# EAGLE board Car Engine Room (EAGLE 6.2)
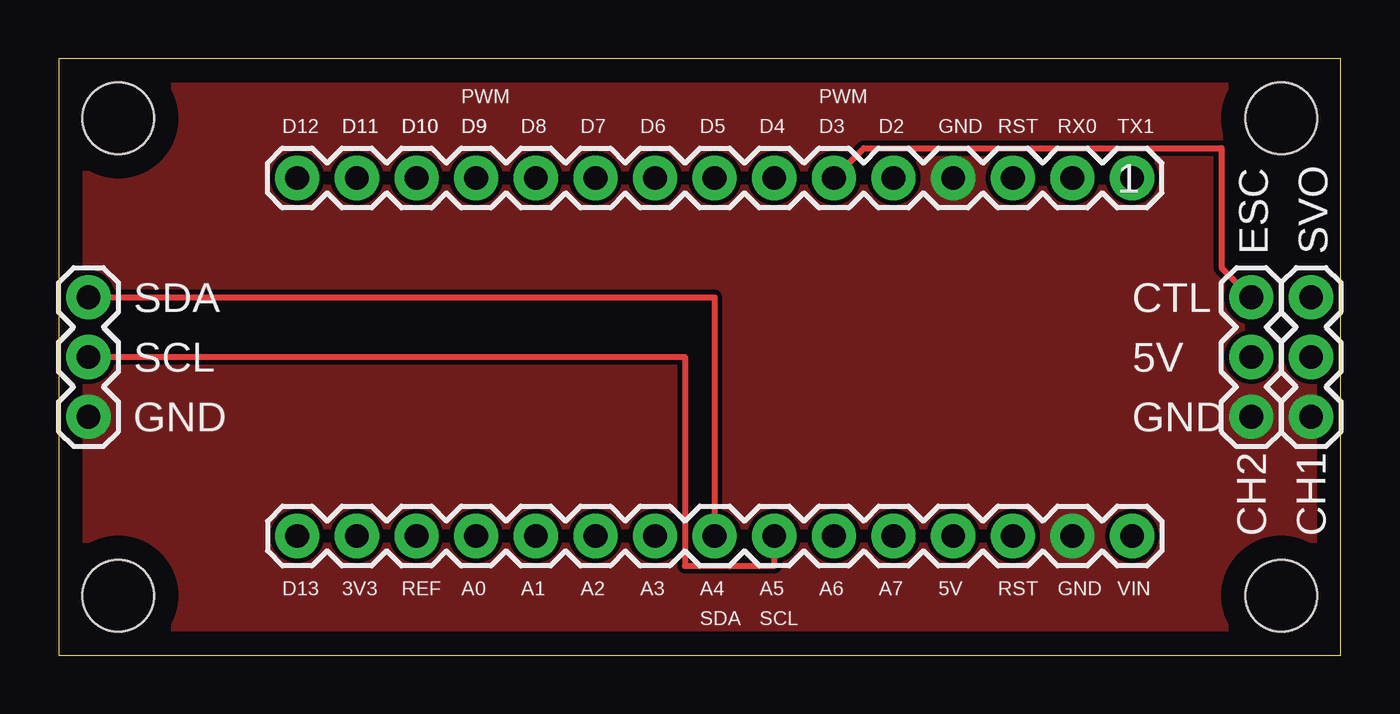
[diagram p0: board, top side]
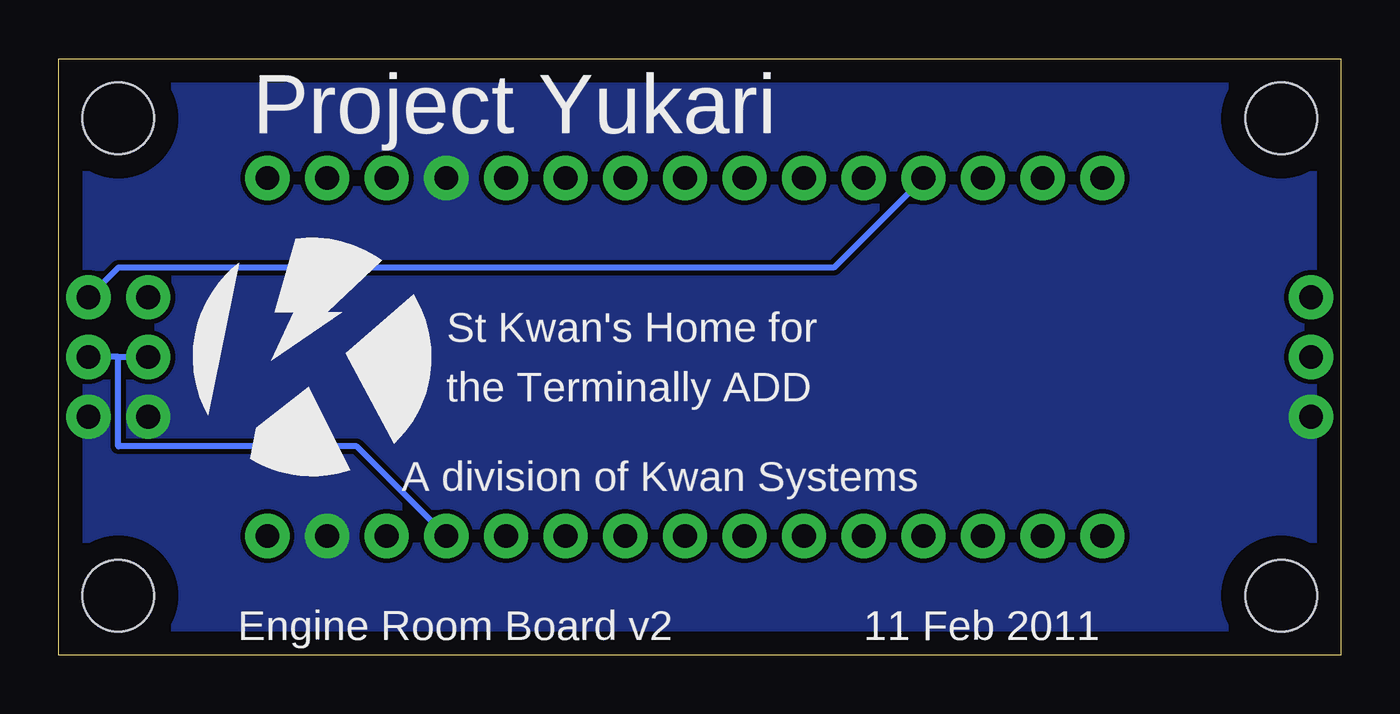
[diagram p1: board, bottom side, seen from below]

Size 54.61 x 25.4 mm. Coordinates in mm from the lower left corner, seen from the top.
Outline: 0,0 54.61,0 54.61,25.4 0,25.4 0,0
Copper layers (1*16): Top 0.035mm / dielectric 1.5mm / Bottom 0.035mm
Design rules: minimum track width 10mil, minimum drill 24mil, track to track 8mil, track to pad 8mil, pad to pad 8mil, via to via 8mil, smd to smd 8mil, copper to edge 40mil, drill to drill 8mil, minimum pad ring 10mil, minimum via ring 8mil, stop-mask expansion 4mil, vias tented up to drill 0mil, thermal gap 10mil
Net classes: 1 power: width 1.524 mm, clearance 0.254 mm

## Footprints (pad centres in the part's own frame; a part is rotated, then mirrored left to right if it is on the bottom)
1X03 = drill 1.016 pad 1.88: 1 0,0; 2 2.54,0; 3 5.08,0
1X15 = drill 1.016 pad 1.88: 1 0,0; 2 2.54,0; 3 5.08,0; 4 7.62,0; 5 10.16,0; 6 12.7,0; 7 15.24,0; 8 17.78,0; 9 20.32,0; 10 22.86,0; 11 25.4,0; 12 27.94,0; 13 30.48,0; 14 33.02,0; 15 35.56,0
STAND-OFF-TIGHT = hole 3.048: 0,0

## Placement (x,y rotation side)
BRIDGE  [1X03]  1.27,10.16 90 top
ESC  [1X03]  50.8,10.16 90 top
JP1  M15  [1X15]  10.16,5.08 0 top
JP5  M15  [1X15]  45.72,20.32 180 top
SVO  [1X03]  53.34,10.16 90 top
U$1  [STAND-OFF-TIGHT]  2.54,2.54 0 top
U$2  [STAND-OFF-TIGHT]  2.54,22.86 0 top
U$3  [KWAN_CIRCLE]  43.81,12.7 0 bottom
U$4  [STAND-OFF-TIGHT]  52.07,22.86 0 top
U$5  [STAND-OFF-TIGHT]  52.07,2.54 0 top

## Library data of the parts
BRIDGE ESC JP1 JP5 SVO U$1-U$5 = SparkFun

## Nets
GND: BRIDGE.1 ESC.1 JP1.14 JP5.4 SVO.1
IN1: ESC.3 JP5.6
IN2: JP5.12 SVO.3
SCL: BRIDGE.2 JP1.9
SDA: BRIDGE.3 JP1.8
VCC: ESC.2 JP1.12 SVO.2

## Tracks (layer width: path | path; a pad name or v marks a point on that pad's centre or on a via)
GND
  pour Bottom (no thermals): 0,25.4 54.61,25.4 54.61,0 0,0
  pour Top (no thermals): 0,25.4 54.61,25.4 54.61,0 0,0
IN1
  Top 0.254: JP5.6 34.29,21.59 49.53,21.59 49.53,16.51 ESC.3
IN2
  Bottom 0.254: JP5.12 21.59,16.51 52.07,16.51 SVO.3
SCL
  Top 0.254: BRIDGE.2 26.67,12.7 26.67,3.81 30.48,3.81 JP1.9
SDA
  Top 0.254: BRIDGE.3 27.94,15.24 JP1.8
VCC
  Bottom 0.254: JP1.12 41.91,8.89 52.07,8.89 52.07,12.7 | 52.07,12.7 ESC.2 | 52.07,12.7 SVO.2

## Text on the board
tPlace: PWM | PWM | D12 | D11 | D11 | D10 | D10 | D9 | D9 | D8 | D7 | D6 | D5 | D4 | D3 | D2 | GND | RST | RX0 | TX1 | 1 | SDA | CTL | SCL | 5V | GND | GND | CH2 | CH1 | D13 | 3V3 | REF | A0 | A1 | A2 | A3 | A4 | A5 | A6 | A7 | 5V | RST | GND | VIN | SDA | SCL
bPlace: Project Yukari | St Kwan's Home for | the Terminally ADD | A division of Kwan Systems | 11 Feb 2011 | Engine Room Board v2